# Altium PCB PCB_PCB_power-bank-module-advance_2024-09-19_2025-10-18.pcbdoc
Units mm, origin at the board's own origin, x right, y up, seen from the top; angles counter-clockwise.
Board outline 80.76 x 70.96 mm, 2 copper layers (Top Layer, Bottom Layer); 23 components, 21 nets, 126 pads, 9 vias.
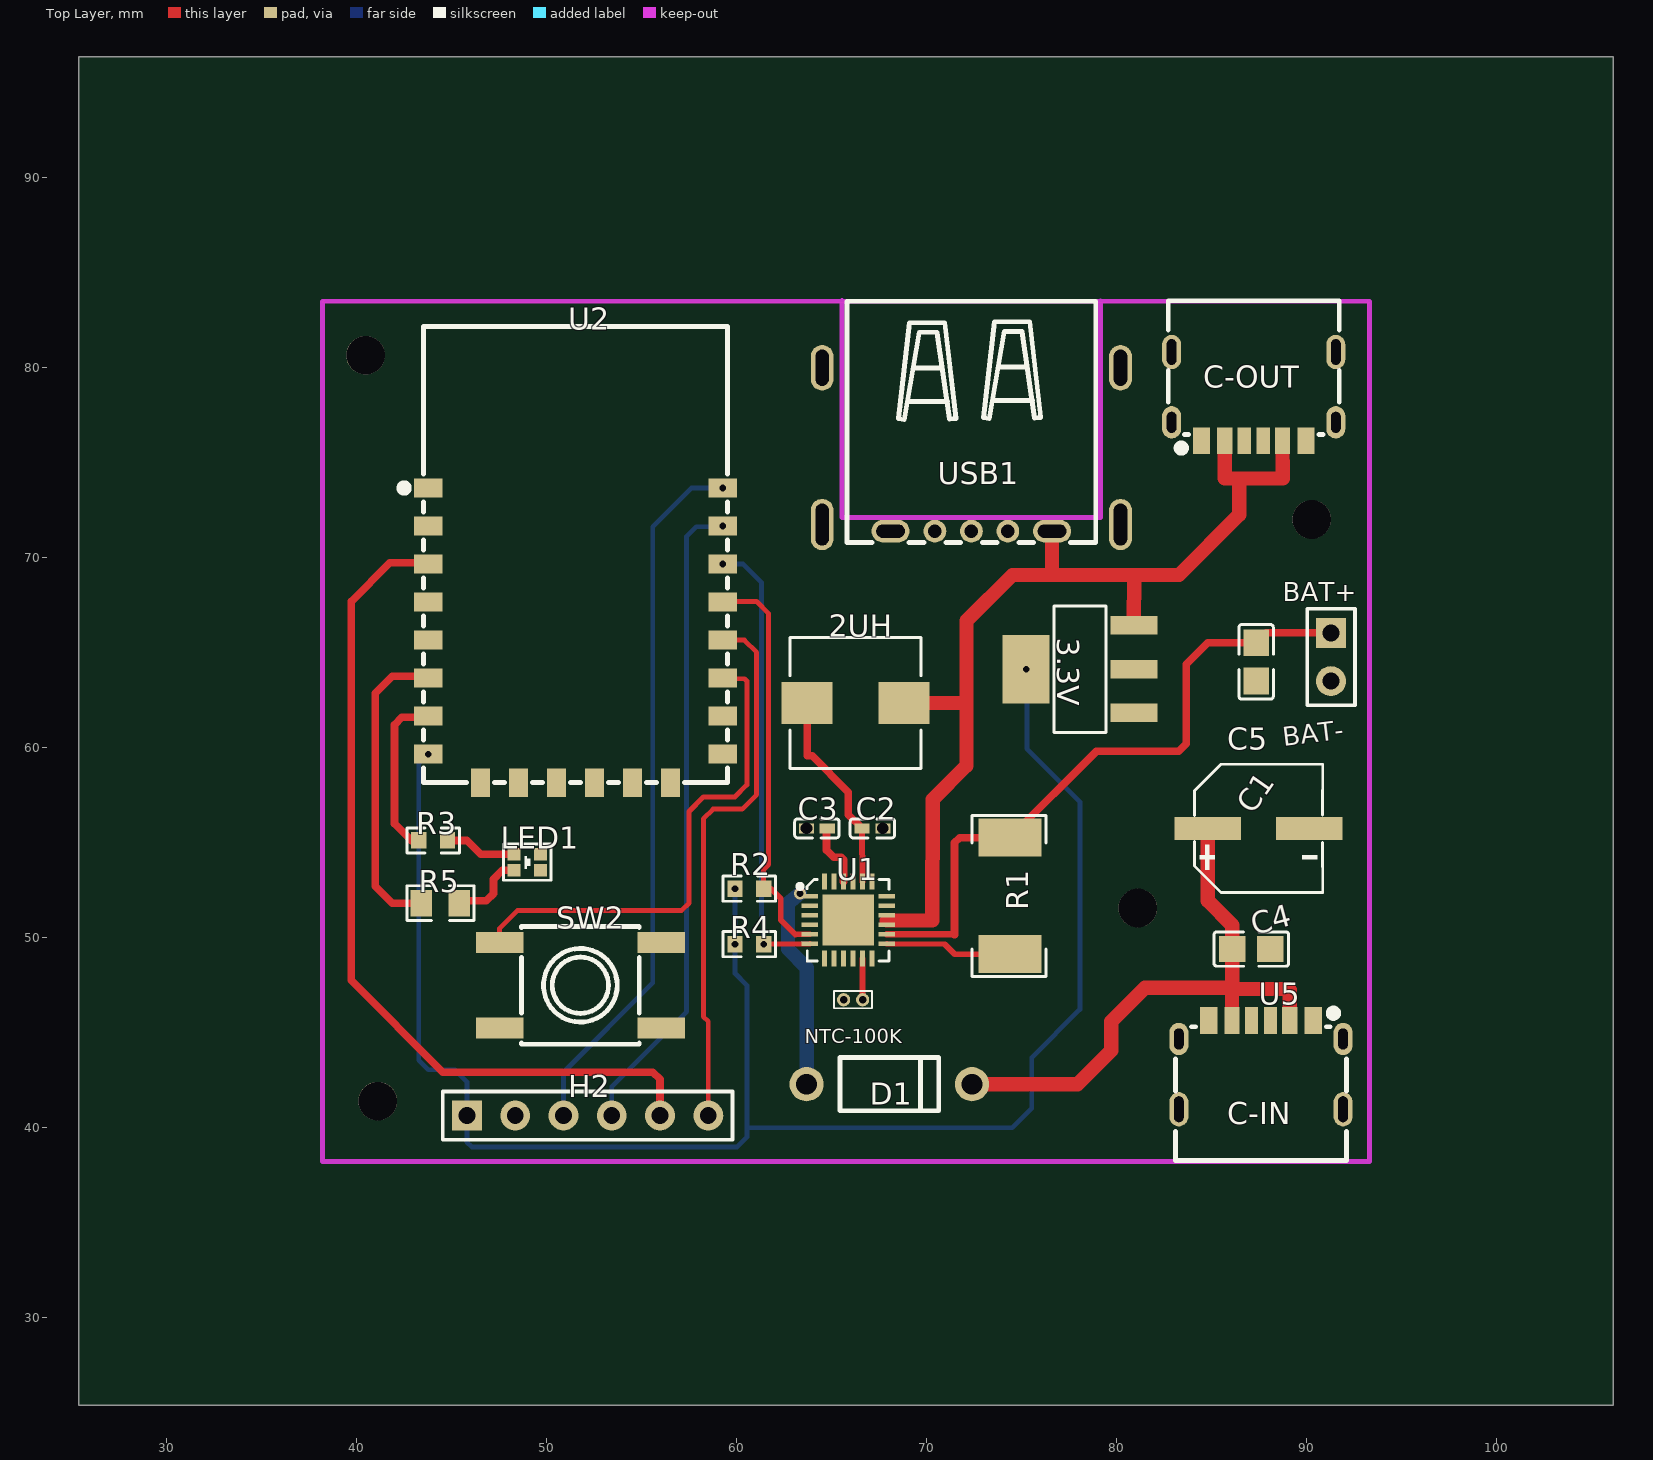
[diagram p0: Top Layer view]
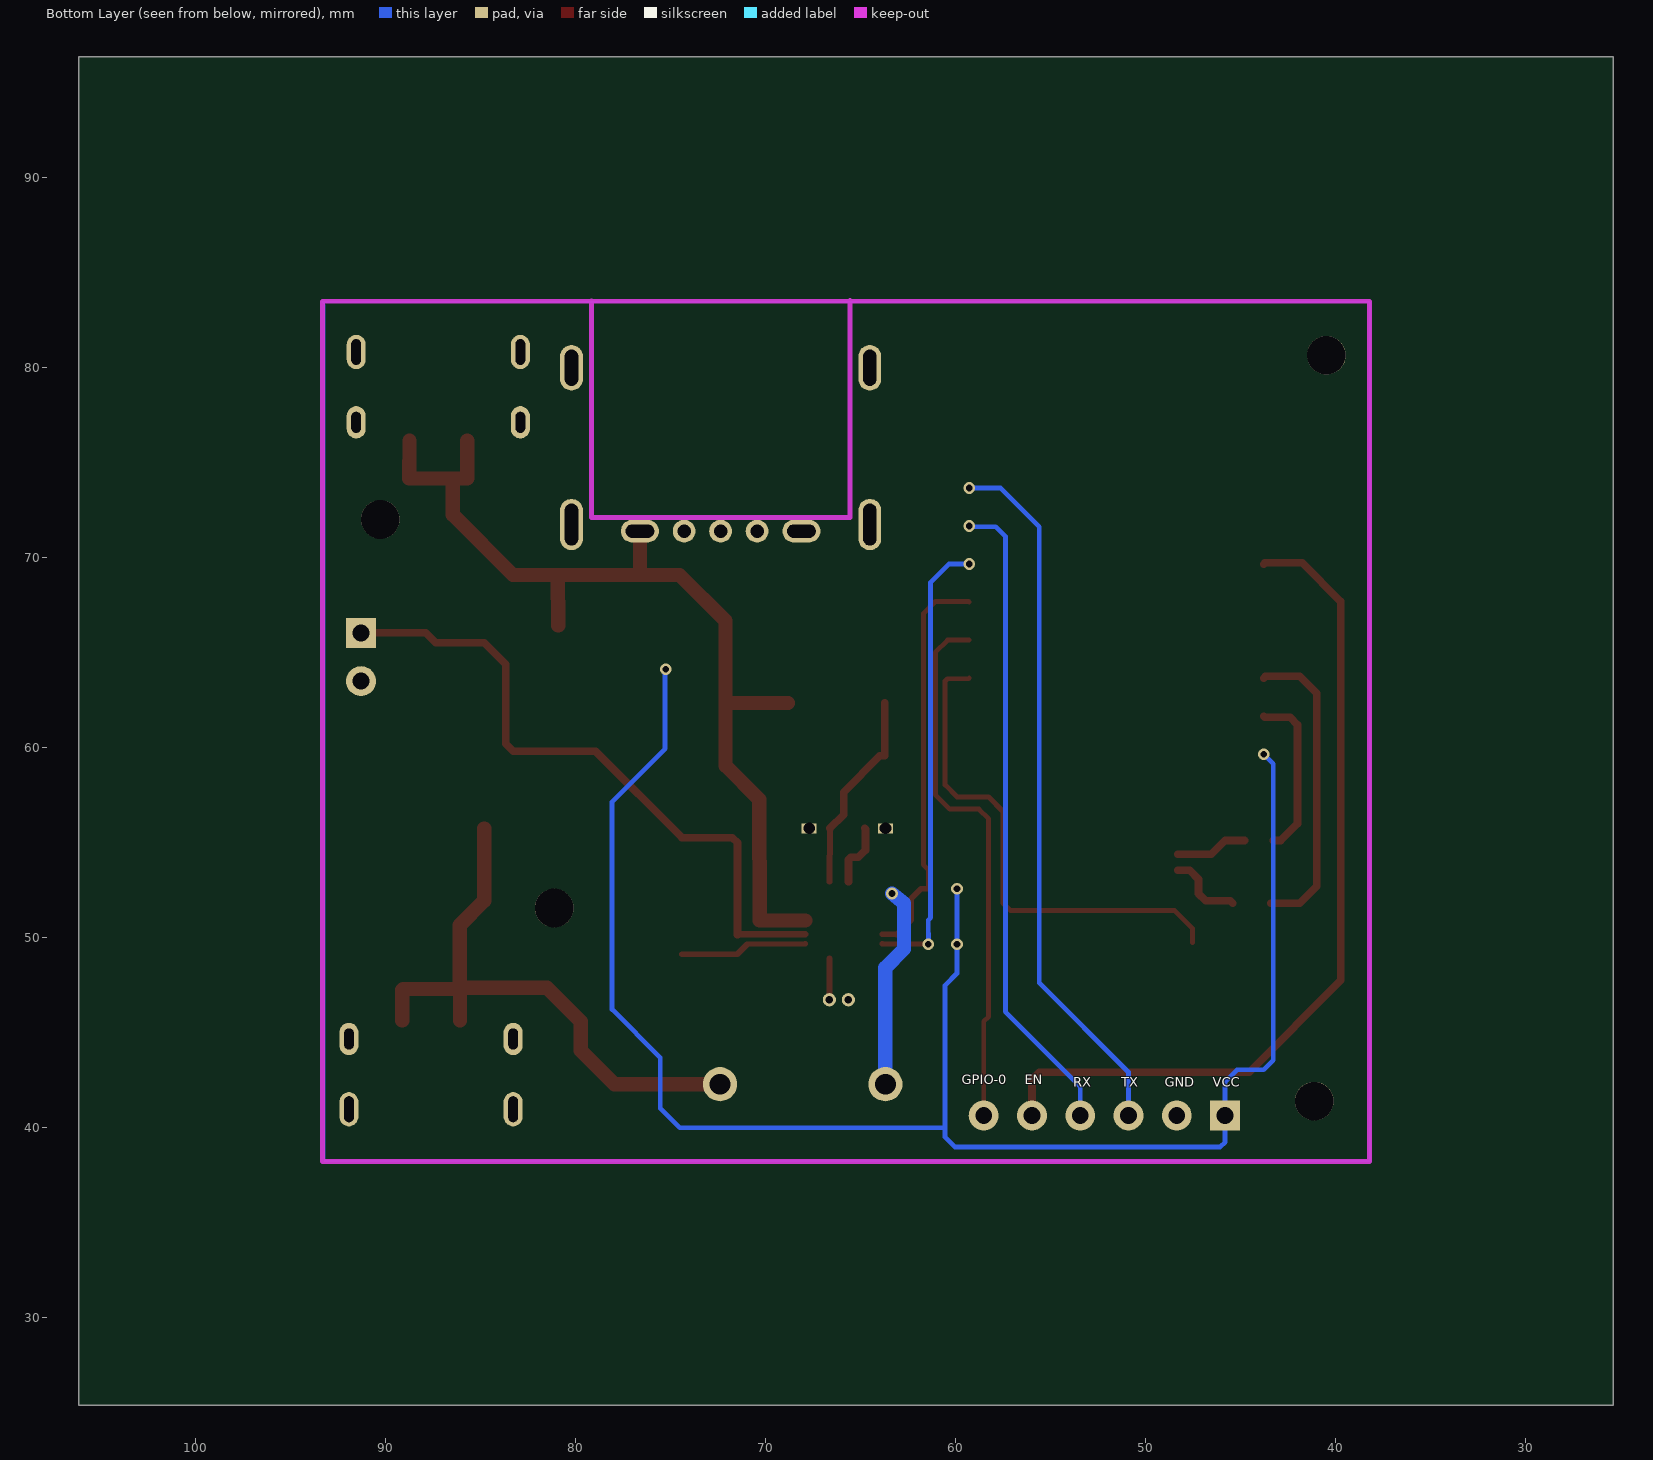
[diagram p1: Bottom Layer view, seen from below]

## Layer stack, top to bottom
Top Layer: signal copper (thickness not stored)
Dielectric: dielectric 0.32, FR-4, Dk 4.8
Bottom Layer: signal copper (thickness not stored)

## Board outline
106.157,25.4 25.4,25.4 25.4,96.362 106.157,96.362

## Components (designator, comment, footprint, x,y, rotation, side; value= is the part's Value field where it differs from the comment)
2UH "2uH" IND-SMD_L6.9-W6.9-LS7.0 66.279,62.357 r0 top
3.3V "TLV1117-33IDCYR" SOT-223-4_L6.5-W3.5-P2.30-LS7.0-BR 78.09,64.135 r0 top
BAT+ "HDR-F-2.54_1x2" HDR-F-2.54_1X2 91.298,64.77 r270 top
C1 "100uF" CAP-SMD_BD6.3-L6.6-W6.6-LS7.4-FD 87.488,55.753 r0 top
C2 "100nF" C0402 67.168,55.753 r0 top
C3 "100nF" C0402 64.247,55.753 r180 top
C4 "10uF" C0805 87.107,49.403 r0 top
C5 "10uF" C0805 87.361,64.516 r270 top
C-OUT "GT-USB-7002C" USB-C-SMD_GT-USB-7002C 87.234,78.486 r180 top
D1 "1N5819_C3758736" DO-41_BD2.4-L4.7-P8.70-D0.8-FD 68.057,42.291 r0 top
H2 "HDR-F-2.54_1x6" HDR-F-2.54_1X6 50.912,40.64 r0 top
LED1 "19-223/R6BHC-A05/2T" LED-ARRAY-SMD_4P-L1.6-W1.3-BR-FD 49.007,53.975 r180 top
NTC-100K "NTC-100K" RES-TH_NTC-100K 66.152,46.736 r0 top
R1 "100mΩ" RES-SMD_L6.4-W3.2-R2512 74.407,52.197 r90 top
R2 "4.7kΩ" R0603 60.691,52.578 r180 top
R3 "220Ω" R0603 44.054,55.118 r180 top
R4 "4.7kΩ" R0603 60.691,49.657 r0 top
R5 "470Ω" R0805 44.435,51.816 r180 top
SW2 "PS1" SW-SMD_4P-L6.2-W6.2-P4.50-LS8.6 51.801,47.498 r0 top
U1 "BQ25895MRTWR" WQFN-24_L4.0-W4.0-P0.50-TL-EP2.7 65.898,50.927 r0 top
U2 "ESP-12F" WIRELM-SMD_ESP-12F 51.547,65.913 r0 top
U5 "GT-USB-7002C" USB-C-SMD_GT-USB-7002C 87.615,43.307 r0 top
USB1 "U224-051N-3GRA035" USB-A-TH_U224-051N-3GRA035 72.375,75.692 r180 top

## Footprints (in the part's own frame and the unit in brackets; to place one, negate y for a bottom-side part, rotate by r counter-clockwise, add the part's x,y. Pads: shape width x height; smd on the part's side, far side on the other; paste and mask are expansions set on the pad)
C0402 [mm]
  rect 0.79x0.54 smd paste-100 mask+0.051: 1(-0.545,0)
  rect 0.79x0.54 hole 0.61 paste-100 mask+0.051: 2(0.545,0)
  silkscreen extent -1.17,-0.5 1.17,0.5
C0805 [mm]
  rect 1.41x1.35 smd paste-100 mask+0.051: 1(-1,0) 2(1,0)
  silkscreen extent -1.96,-0.9 1.96,0.9
CAP-SMD_BD6.3-L6.6-W6.6-LS7.4-FD [mm]
  rect 3.5x1.2 smd paste+0 mask+0.051: 1(-2.67,0) 2(2.67,0)
  silkscreen extent -3.38,-3.38 3.38,3.38
DO-41_BD2.4-L4.7-P8.70-D0.8-FD [mm]
  round 1.8 hole 1.1 paste+0 mask+0.051: 1(-4.35,0) 2(4.35,0)
  silkscreen extent -2.6,-1.4 2.6,1.4
HDR-F-2.54_1X2 [mil]
  rect 62x62 hole 35 paste+0 mask+2: 1(-50,0)
  round 62 hole 35 paste+0 mask+2: 2(50,0)
  silkscreen extent -100,-49 100,50
HDR-F-2.54_1X6 [mil]
  rect 62x62 hole 35 paste+0 mask+2: 1(-200,0)
  round 62 hole 35 paste+0 mask+2: 2(-100,0) 3(0,0) 4(100,0) 5(200,0) 6(300,0)
  silkscreen extent -250,-50 350,50
IND-SMD_L6.9-W6.9-LS7.0 [mm]
  rect 2.7x2.2 smd paste+0 mask+0.051: 1(-2.55,0) 2(2.55,0)
  silkscreen extent -3.45,-3.45 3.45,3.45
LED-ARRAY-SMD_4P-L1.6-W1.3-BR-FD [mm]
  rect 0.7x0.65 smd paste+0 mask+0.051: 1(0.7,-0.425) 2(-0.7,-0.425) 3(0.7,0.425) 4(-0.7,0.425)
  silkscreen extent -1.25,-0.95 1.25,0.95
R0603 [mm]
  rect 0.806x0.864 smd paste-100 mask+0.051: 1(-0.753,0) 2(0.753,0)
  silkscreen extent -1.39,-0.66 1.39,0.66
R0805 [mm]
  rect 1.133x1.377 smd paste-100 mask+0.051: 1(-1,0) 2(1,0)
  silkscreen extent -1.76,-0.92 1.76,0.92
RES-SMD_L6.4-W3.2-R2512 [mm]
  rect 2x3.3 smd paste+0 mask+0.051: 1(-3.066,0) 2(3.066,0)
  silkscreen extent -4.23,-1.91 4.23,2.01
RES-TH_NTC-100K [mm]
  round 0.7 hole 0.4 paste+0 mask+0.05: 1(-0.5,0) 2(0.5,0)
  silkscreen extent -1,-0.45 1,0.45
SOT-223-4_L6.5-W3.5-P2.30-LS7.0-BR [mm]
  rect 2.47x0.98 smd paste+0 mask+0.051: 1(2.835,-2.3) 2(2.835,0) 3(2.835,2.3)
  rect 2.47x3.6 smd paste+0 mask+0.051: 4(-2.835,0)
  silkscreen extent -1.37,-3.33 1.37,3.33
SW-SMD_4P-L6.2-W6.2-P4.50-LS8.6 [mm]
  rect 2.5x1.1 smd paste+0 mask+0.051: 1(-4.25,2.25) 2(4.25,2.25) 3(-4.25,-2.25) 4(4.25,-2.25)
  silkscreen extent -3.1,-3.1 3.1,3.1
USB-A-TH_U224-051N-3GRA035 [mm]
  oval 2x1.2 hole 0.7 slot 1.5 at 0 deg paste+0 mask+0.051: 1(-4.25,4.3) 5(4.25,4.3)
  round 1.2 hole 0.7 paste+0 mask+0.051: 2(-1.92,4.3) 3(0,4.3) 4(1.92,4.3)
  oval 1.2x2.7 hole 0.7 slot 2.2 at 90 deg paste+0 mask+0.051: 6(-7.85,3.95) 7(7.85,3.95)
  oval 1.2x2.4 hole 0.7 slot 1.9 at 90 deg paste+0 mask+0.051: 8(-7.85,-4.3) 9(7.85,-4.3)
  Keep-Out Layer lines w0.254: 6.8,-7.843 6.8,3.58 -6.8,3.58 -6.8,-7.808
  silkscreen extent -6.55,-7.8 6.55,4.9
USB-C-SMD_GT-USB-7002C [mm]
  rect 0.7x1.4 smd paste-100 mask+0.051: A05(-0.5,2.335) B05(0.5,2.335)
  rect 0.8x1.4 smd paste-100 mask+0.051: A09(1.52,2.335) B09(-1.52,2.335)
  rect 0.9x1.4 smd paste-100 mask+0.051: A12(2.75,2.335) B12(-2.75,2.335)
  oval 1x1.8 hole 0.5 slot 1.35 at 90 deg paste+0 mask+0.051: SHELL(-4.32,-2.335) SHELL(4.32,-2.335)
  oval 1x1.7 hole 0.5 slot 1.1 at 90 deg paste+0 mask+0.051: SHELL(-4.32,1.365) SHELL(4.32,1.365)
  silkscreen extent -4.5,-5.03 4.5,2.92
WIRELM-SMD_ESP-12F [mm]
  rect 1.5x1 smd paste+0 mask+0.05: 1(-7.75,7.75) 2(-7.75,5.75) 3(-7.75,3.75) 4(-7.75,1.75) 5(-7.75,-0.25) 6(-7.75,-2.25) 7(-7.75,-4.25) 8(-7.75,-6.25) 15(7.75,-6.25) 16(7.75,-4.25) 17(7.75,-2.25) 18(7.75,-0.25) 19(7.75,1.75) 20(7.75,3.75) 21(7.75,5.75) 22(7.75,7.75)
  rect 1x1.5 smd paste+0 mask+0.05: 9(-5,-7.75) 10(-3,-7.75) 11(-1,-7.75) 12(1,-7.75) 13(3,-7.75) 14(5,-7.75)
  silkscreen extent -9.22,-7.75 8,16.26
WQFN-24_L4.0-W4.0-P0.50-TL-EP2.7 [mm]
  rect 0.85x0.25 smd paste-100 mask+0.05: 1(-2.025,1.25) 2(-2.025,0.75) 3(-2.025,0.25) 4(-2.025,-0.25) 5(-2.025,-0.75) 6(-2.025,-1.25) 13(2.025,-1.25) 14(2.025,-0.75) 15(2.025,-0.25) 16(2.025,0.25) 17(2.025,0.75) 18(2.025,1.25)
  rect 0.25x0.85 smd paste-100 mask+0.05: 7(-1.25,-2.025) 8(-0.75,-2.025) 9(-0.25,-2.025) 10(0.25,-2.025) 11(0.75,-2.025) 12(1.25,-2.025) 19(1.25,2.025) 20(0.75,2.025) 21(0.25,2.025) 22(-0.25,2.025) 23(-0.75,2.025) 24(-1.25,2.025)
  rect 2.7x2.7 smd paste-100 mask+0.05: 25(0,0)
  silkscreen extent -2.66,-2.16 2.14,2.14

## Free pads (board coordinates)
  round 2.032 hole 2.032 unplated paste+0: ""(40.498,80.645) ""(41.133,41.402) ""(81.138,51.562) ""(90.282,72.009)

## Via types
v1: diameter 0.61, hole 0.35, Top Layer to Bottom Layer, tented both sides, 9 vias

## Nets (pads, with @x,y where several pads share a name; then routed paths per layer and width w, separated by ;. In a path a pad name is that pad's centre, name@x,y a point inside that pad or via, vN(x,y) a via of type N, cw(c..) or ccw(c..) an arc to the next point about the centre after c; other vN are vias at no path point)
D1_2: C1.1 C4.1 D1.2 U5.A09 U5.B09 | length 32
  Top Layer w0.75: D1.2 77.963,42.291 79.741,44.069 79.741,45.593 81.519,47.371 86.035,47.371 86.1,47.305 89.073,47.306 89.135,47.244 U5.A09 ; C1.1 84.821,51.943 86.106,50.658 C4.1 U5.B09
GND: 3.3V.1 BAT+.2 C1.2 C2.2 C3.2 C4.2 C5.2 C-OUT.A12 C-OUT.B12 H2.2 LED1.2 LED1.4 NTC-100K.1 SW2.3 U1.17 U1.18 U2.15 U5.A12 U5.B12 USB1.5
LED1_1: LED1.1 R3.1 | length 3.8
  Top Layer w0.4: R3.1 45.832,55.118 46.55,54.4 LED1.1
LED1_3: LED1.3 R5.1 | length 4
  Top Layer w0.4: R5.1 45.562,51.943 46.848,51.943 47.229,52.324 47.229,53.086 47.693,53.55 LED1.3
U1_1: D1.1 U1.1 | length 10.7
  Bottom Layer w0.75: v1(63.358,52.324) 62.723,51.816 62.723,49.403 63.707,48.419 D1.1
U1_5: R2.1 U1.5 U2.19 | length 21.4
  Top Layer w0.254: U2.19 59.325,67.691 61.072,67.691 61.707,67.056 61.707,53.848 61.444,53.585 R2.1
  Top Layer w0.3: R2.1 61.834,52.578 62.342,52.07 62.342,50.927 63.104,50.165 U1.5
U1_6: R4.2 U1.6 U2.20 | length 24
  Top Layer w0.3: v1(61.445,49.657) U1.6
  Bottom Layer w0.254: v1(59.297,69.663) 60.371,69.662 61.326,68.707 61.326,51.054 61.453,50.927 v1(61.445,49.657)
U1_11: NTC-100K.2 U1.11 | length 2.2
  Top Layer w0.3: U1.11 66.652,48.898 NTC-100K.2
U1_13: R1.1 U1.13 | length 6.7
  Top Layer w0.3: U1.13 70.978,49.657 71.504,49.131 R1.1
U1_14: BAT+.1 C5.1 R1.2 U1.14 | length 35.2
  Top Layer w0.35: U1.14 71.486,50.165
  Top Layer w0.4: 71.486,50.165 71.486,54.991 71.758,55.263 R1.2 78.96,59.817 83.297,59.817 83.678,60.198 83.678,64.389 84.805,65.516 C5.1 87.885,66.04 BAT+.1
U1_15: 2UH.2 3.3V.3 C-OUT.A09 C-OUT.B09 U1.15 U1.16 USB1.1 | length 52.9
  Top Layer w0.75: 67.922,50.907 70.322,50.907 70.343,57.277 72.121,59.055 72.121,66.675 74.534,69.088 83.297,69.088 86.472,72.263 86.472,74.14 86.505,74.171 ; 2UH.2 71.983,62.357 72.121,62.219 ; USB1.1 76.625,69.273 76.81,69.088 ; 3.3V.3@80.924,66.434 80.95,69.088 ; C-OUT.A09 85.715,74.173 88.758,74.168 C-OUT.B09
U1_20: 2UH.1 C2.1 U1.20 | length 10.8
  Top Layer w0.3: C2.1 U1.20 U1.20@66.648,52.959
  Top Layer w0.4: 2UH.1 63.729,59.573 63.993,59.563 65.898,57.658 65.898,56.478 C2.1
U1_22: C3.1 U1.22 | length 3.4
  Top Layer w0.4: C3.1 64.755,55.716 64.755,54.61 65.136,54.229 65.517,54.229 65.648,54.098 U1.22
U2_3: H2.5 U2.3 | length 45.2
  Top Layer w0.4: U2.3 43.736,69.723 41.768,69.723 39.736,67.691 39.736,47.752 44.562,42.926 55.611,42.926 55.992,42.545 H2.5
U2_6: R5.2 U2.6 | length 16.2
  Top Layer w0.4: R5.2 41.895,51.816 41.006,52.705 41.006,62.865 41.895,63.754 43.706,63.754 U2.6
U2_7: R3.2 U2.7 | length 8.8
  Top Layer w0.4: R3.2 42.911,55.118 42.022,56.007 42.022,61.214 42.403,61.595 43.729,61.595 U2.7
U2_8: 3.3V.4 H2.1 R2.2 R4.1 U2.8 | length 91.6
  Bottom Layer w0.254: v1(43.797,59.663) 43.292,59.158 43.292,43.561 43.8,43.053 45.197,43.053 45.832,42.418 H2.1 45.832,39.243 46.086,38.989 60.056,38.989 60.564,39.497 60.564,47.498 59.937,48.124 v1(59.937,49.657) v1(59.937,52.578) ; 60.564,39.999 74.528,39.999 75.55,41.021 75.55,43.688 78.09,46.228 78.09,57.15 75.296,59.944 75.296,64.094 v1(75.255,64.135)
U2_17: SW2.1 U2.17 | length 26.5
  Top Layer w0.254: SW2.1 47.551,50.488 48.499,51.435 57.135,51.435 57.516,51.816 57.516,56.642 58.278,57.404 59.929,57.404 60.564,58.039 60.564,60.564 60.564,63.5 60.437,63.627 59.332,63.627 U2.17
U2_18: H2.6 U2.18 | length 28.6
  Top Layer w0.254: H2.6 58.532,45.593 58.278,45.847 58.278,56.261 58.786,56.769 60.31,56.769 61.072,57.531 61.072,65.024 60.433,65.663 U2.18
U2_21: H2.4 U2.21 | length 34.2
  Bottom Layer w0.254: H2.4 53.452,42.164 57.389,46.101 57.389,71.12 57.897,71.628 59.262,71.628 v1(59.297,71.663)
U2_22: H2.3 U2.22 | length 37.5
  Bottom Layer w0.254: H2.3 50.912,42.926 55.611,47.625 55.611,71.628 57.643,73.66 v1(59.297,73.663)
pads on no net: 3.3V.2 C-OUT.A05 C-OUT.B05 C-OUT.SHELL SW2.2 SW2.4 U1.2 U1.3 U1.4 U1.7 U1.8 U1.9 U1.10 U1.12 U1.19 U1.21 U1.23 U1.24 U1.25 U2.1 U2.2 U2.4 U2.5 U2.9 U2.10 U2.11 U2.12 U2.13 U2.14 U2.16 U5.A05 U5.B05 U5.SHELL USB1.2 USB1.3 USB1.4 USB1.6 USB1.7 USB1.8 USB1.9

## Polygon pours and split planes (outlines as drawn)
GND on Bottom Layer (solid): 38.212,83.439 93.33,83.439 93.203,83.312 93.203,38.227 38.212,38.227
GND on Bottom Layer (solid): 38.212,83.439 93.33,83.439 93.203,83.312 93.203,38.227 38.212,38.227
GND on Bottom Layer (solid): 38.212,83.439 38.212,38.227 93.203,38.227 93.203,83.439
GND on Top Layer (solid): 38.212,83.439 93.33,83.439 93.203,83.312 93.203,38.227 38.212,38.227
GND on Top Layer (solid): 38.212,83.439 38.339,83.566 93.203,83.566 93.203,38.227 38.212,38.227
GND on Top Layer (solid): 38.212,83.439 93.33,83.439 93.203,83.312 93.203,38.227 38.212,38.227

## Silkscreen, mask and mechanical layers (free items; w line width, h text height)
Top Overlay:
  text "BAT-" at 88.819,60.083 h1 r7
  text "C-IN" at 85.837,40.195 h1.14
Bottom Overlay:
  text "EN" at 56.373,42.295 h0.5
  text "GPIO-0" at 59.675,42.295 h0.5
  text "VCC" at 46.467,42.168 h0.5
  text "GND" at 49.007,42.168 h0.5
  text "TX" at 51.293,42.168 h0.5
  text "RX" at 53.833,42.168 h0.5